# Altium PCB PCB.PcbDoc
Units mil, origin at the board's own origin, x right, y up, seen from the top; angles counter-clockwise.
Board outline 6000 x 4000 mil, 2 copper layers (Top Layer, Bottom Layer); 43 components, 32 nets, 110 pads, 0 vias.
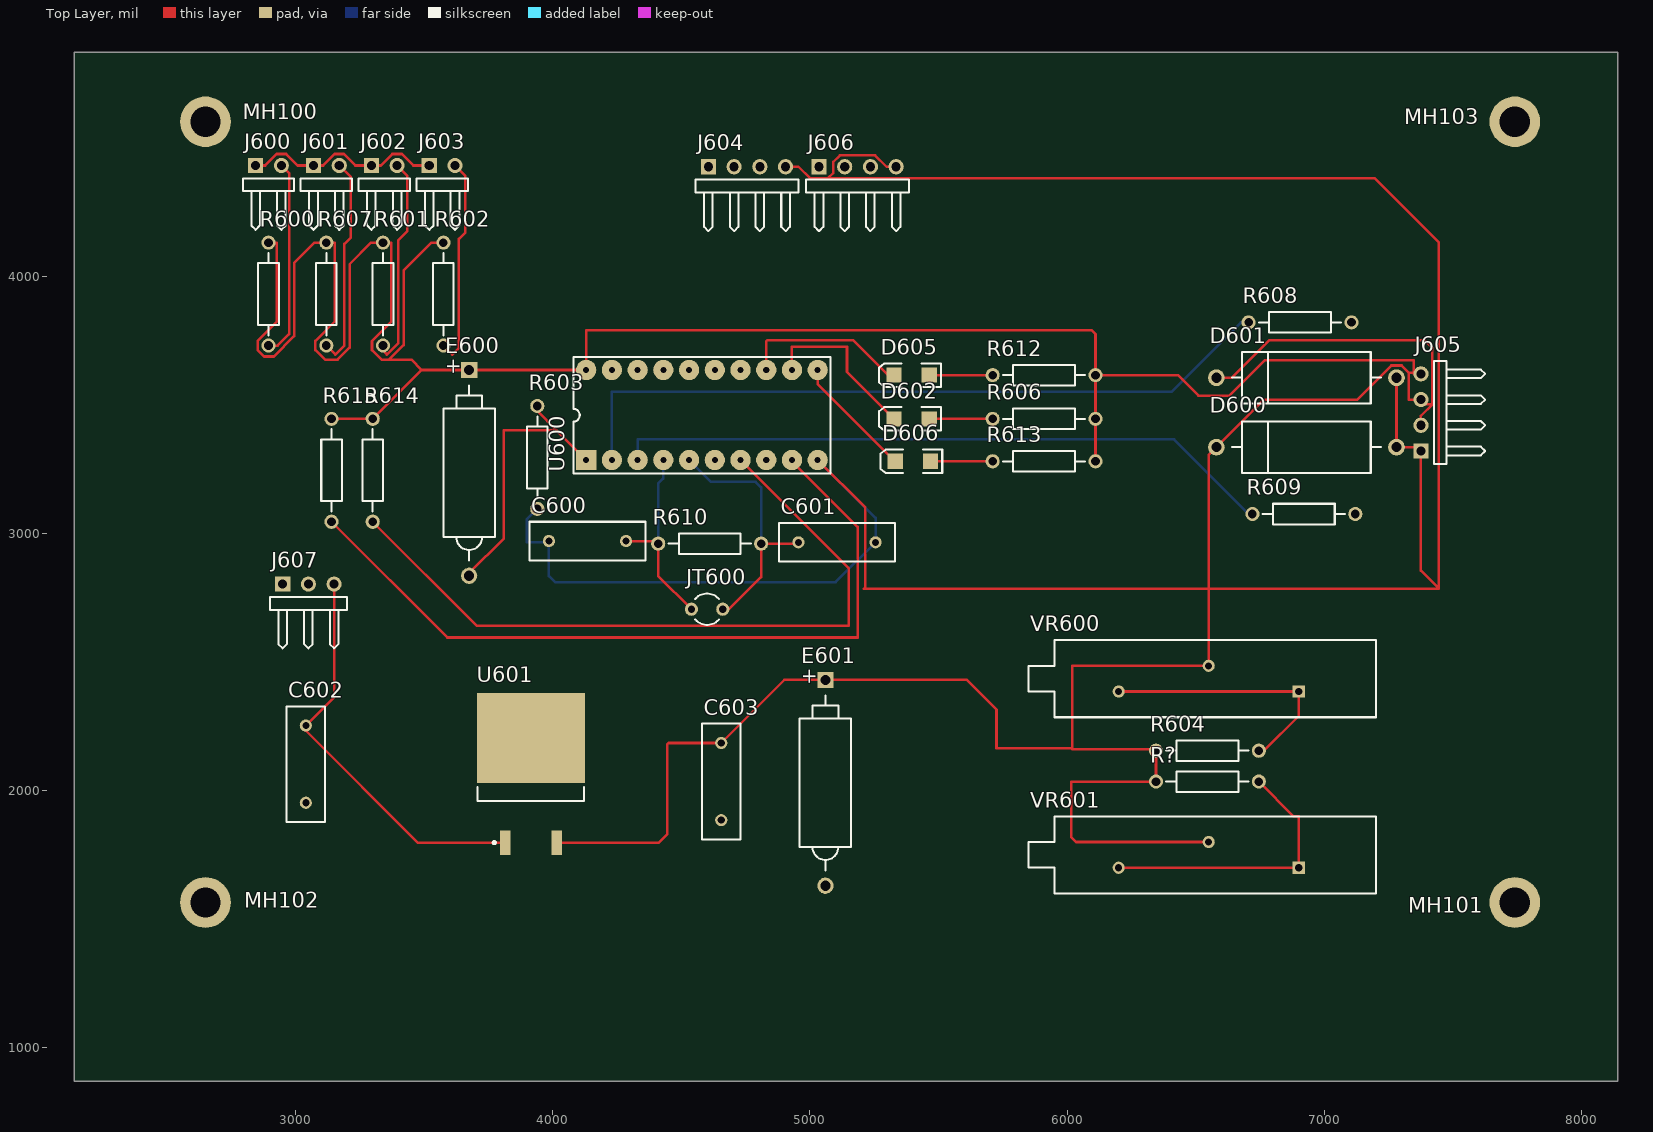
[diagram p0: Top Layer view]
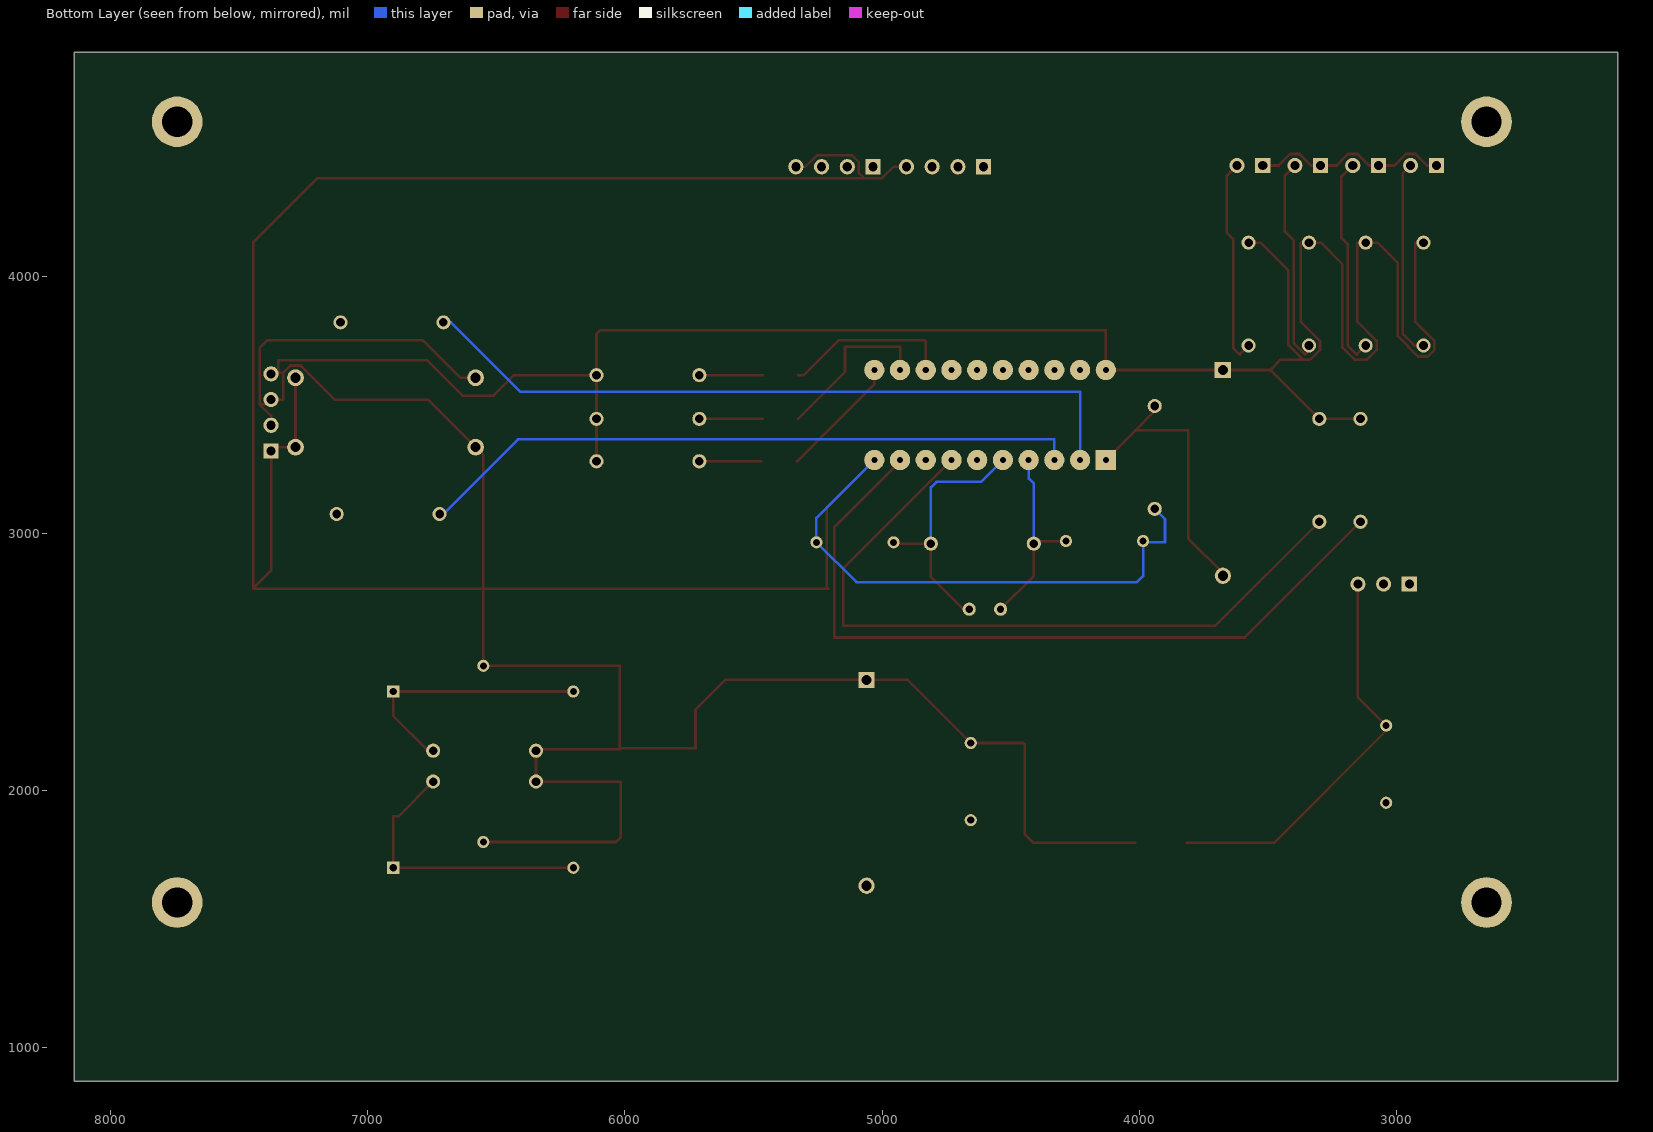
[diagram p1: Bottom Layer view, seen from below]

## Layer stack, top to bottom
Top Solder: solder mask 0.4, Solder Resist, Dk 3.5
Top Layer: signal copper 1.4
Dielectric 1: dielectric 12.6, FR-4, Dk 4.8
Bottom Layer: signal copper 1.4
Bottom Solder: solder mask 0.4, Solder Resist, Dk 3.5

## Board outline
2140,870 8140,870 8140,4870 2140,4870

## Design rules (kind name [scope] priority, off if disabled: settings)
Clearance [All] p1: gap=10
PolygonConnect [All] p1: connectstyle=Relief reliefconductorwidth=10 reliefentries=4 polygonreliefangle="90 Angle" airgapwidth=10
RoomDefinition Sheet1 [InComponentClass('Sheet1')] p1: confinementstyle=ConfineIn formatcopy=TRUE lockcomponents=FALSE outline 2525,4710 7850,4710 7850,1425 2525,1425
RoutingVias [All] p1: holewidth=28 width=50 viastyle="Through Hole" minholewidth=28 minwidth=50 maxholewidth=28 maxwidth=50
SolderMaskExpansion [All] p1: expansion=4
Width [All] p1: maxlimit=10 minlimit=10 preferedwidth=10
30 further rules are at their usual default settings.

## Classes and differential pairs
component class Sheet1: C600 C601 C602 C603 D600 D601 D602 D605 D606 E600 E601 J600 J601 J602 J603 J604 J605 J606 J607 JT600 R600 R601 R602 R603 R604 R606 R607 R608 R609 R610 R612 R613 R614 R615 R? U600 U601 VR600 VR601

## Components (designator, comment, footprint, x,y, rotation, side; value= is the part's Value field where it differs from the comment)
C600 "Cap" RAD-0.3 4135,2970 r0 top
C601 "Cap" RAD-0.3 5105,2965 r180 top
C602 "" RAD-0.3 3040,2102.52 r90 top
C603 "" RAD-0.3 4655,2035 r90 top
D600 "SMAJ5.1A" DIODE-0.7 6930,3335 r180 top
D601 "SMAJ5.1A" DIODE-0.7 6930,3605 r180 top
D602 "LED-R" 3.2X1.6X1.1 5395,3445 r180 top
D605 "LED-B" 3.2X1.6X1.1 5395,3615 r180 top
D606 "LED-R" 3.2X1.6X1.1 5400,3280 r180 top
E600 "Cap Pol2" POLAR0.8 3675,3235 r90 top
E601 "" POLAR0.8 5060,2030 r90 top
J600 "EH2" HDR1X2H 2845,4430 r0 top
J601 "EH2" HDR1X2H 3070,4430 r0 top
J602 "EH2" HDR1X2H 3295,4430 r0 top
J603 "EH2" HDR1X2H 3520,4430 r0 top
J604 "EH4" HDR1X4H 4605,4425 r0 top
J605 "EH4" HDR1X4H 7375,3320 r90 top
J606 "EH4" HDR1X4H 5035,4425 r0 top
J607 "EH3" HDR1X3H 2950,2802.52 r0 top
JT600 "24MHz" R38 4600,2705 r270 top
MH100 "HOLE-3.0mm_X" MH 2375,3575 r0 top
MH101 "HOLE-3.0mm_X" MH 7465,540 r0 top
MH102 "HOLE-3.0mm_X" MH 2375,540 r0 top
MH103 "HOLE-3.0mm_X" MH 7465,3575 r0 top
R600 "Res2" AXIAL-0.4 2895,3930 r90 top
R601 "Res2" AXIAL-0.4 3340,3930 r90 top
R602 "Res2" AXIAL-0.4 3575,3930 r90 top
R603 "Res2" AXIAL-0.4 3940,3295 r90 top
R604 "Res2" AXIAL-0.4 6545,2155 r180 top
R606 "Res2" AXIAL-0.4 5910,3445 r0 top
R607 "Res2" AXIAL-0.4 3120,3930 r90 top
R608 "Res2" AXIAL-0.4 6905,3820 r0 top
R609 "Res2" AXIAL-0.4 6920,3075 r0 top
R610 "Res2" AXIAL-0.4 4610,2960 r180 top
R612 "Res2" AXIAL-0.4 5910,3615 r0 top
R613 "Res2" AXIAL-0.4 5910,3280 r0 top
R614 "Res2" AXIAL-0.4 3300,3245 r90 top
R615 "Res2" AXIAL-0.4 3140,3245 r90 top
R? "Res2" AXIAL-0.4 6545,2035 r180 top
U600 "STC12C5052AD" DIP20 4130,3160 r90 top
U601 "" D2PAK_N 3915,2065 r90 top
VR600 "" VR3 6550,2435 r180 top
VR601 "" VR3 6550,1750 r180 top

## Footprints (in the part's own frame and the unit in brackets; to place one, negate y for a bottom-side part, rotate by r counter-clockwise, add the part's x,y. Pads: shape width x height; smd on the part's side, far side on the other; paste and mask are expansions set on the pad)
3.2X1.6X1.1 [mm] "SMT LED; 2 Flat Leads"
  rect 1.5x1.5 smd: 1(-1.75,0) 2(1.75,0)
  silkscreen extent -2.9,-1.15 3.2,1.15
AXIAL-0.4 [mm] "Axial Device, Thru-Hole; 2 Leads; 0.4 in Pin Spacing"
  round 1.4 hole 0.85: 1(-5.08,0) 2(5.08,0)
  silkscreen extent -4.06,-1.02 4.06,1.02
D2PAK_N [mm] "D2-PAK, 4-Leads, Body 8.8x10.4mm, Pitch 2.54mm, Lead Span 15.1mm, IPC Medium Density"
  rect 2.4x1.05 smd: 1(-6.8,2.54) 3(-6.8,-2.54)
  rect 8.9x10.65 smd: 2(3.55,0)
  silkscreen extent -6.92,-5.25 -1.3,5.25, body extent -2.7,-5.28 6.3,5.28, height 4.69
DIODE-0.7 [mm] "Diode, Thru-Hole; 2 Leads; 0.7 in Pin Spacing"
  round 1.65 hole 1: 1(-8.89,0) 2(8.89,0)
  silkscreen extent -7.37,-2.54 7.37,2.54
DIP20 [mm]
  rect 2x2 hole 0.6: 1(3.175,0)
  round 2 hole 0.6: 2(3.175,-2.54) 3(3.175,-5.08) 4(3.175,-7.62) 5(3.175,-10.16) 6(3.175,-12.7) 7(3.175,-15.24) 8(3.175,-17.78) 9(3.175,-20.32) 10(3.175,-22.86) 11(12.065,-22.86) 12(12.065,-20.32) 13(12.065,-17.78) 14(12.065,-15.24) 15(12.065,-12.7) 16(12.065,-10.16) 17(12.065,-7.62) 18(12.065,-5.08) 19(12.065,-2.54) 20(12.065,0)
  silkscreen extent 1.84,-24.13 13.36,1.27
HDR1X2H [mm] "Connector; Header; 2 Position; Right Angle"
  rect 1.5x1.5 hole 0.9: 1(0,0)
  round 1.5 hole 0.9: 2(2.54,0)
  silkscreen extent -1.27,-6.35 3.81,-1.27
HDR1X3H [mm] "Connector; Header; 3 Position; Right Angle"
  rect 1.5x1.5 hole 0.9: 1(0,0)
  round 1.5 hole 0.9: 2(2.54,0) 3(5.08,0)
  silkscreen extent -1.27,-6.35 6.35,-1.27
HDR1X4H [mm] "Connector; Header; 4 Position; Right Angle"
  rect 1.5x1.5 hole 0.9: 1(0,0)
  round 1.5 hole 0.9: 2(2.54,0) 3(5.08,0) 4(7.62,0)
  silkscreen extent -1.27,-6.35 8.89,-1.27
MH [mm]
  round 5 hole 3: 0(6.985,26.035)
POLAR0.8 [mm] "Polarized Capacitor; 2 Leads"
  rect 1.6x1.6 hole 1: 1(10.16,0)
  round 1.6 hole 1: 2(-10.16,0)
  silkscreen extent -8.64,-2.54 8.64,2.54
R38 [mm] "Crystal, Thru-Hole; 2 Leads; Body 3.1 x 8.2 mm (Dia.xH)"
  round 1.3 hole 0.7: 1(0,1.55) 2(0,-1.55)
  silkscreen extent -1.55,-1.19 1.55,1.17
RAD-0.3 [mm] "Radial Cap, Thru-Hole; 2 Leads; 0.3 in Pin Spacing"
  round 1.2 hole 0.7: 1(-3.81,0) 2(3.81,0)
  silkscreen extent -5.71,-1.91 5.71,1.91
VR3 [mm] "Thru-Hole; 3 Leads"
  rect 1.2x1.2 hole 0.7: 1(-8.89,1.27)
  round 1.2 hole 0.7: 2(0,-1.27) 3(8.89,1.27)
  silkscreen extent -16.51,-3.81 17.78,3.81

## Part data
C600 C601: "Capacitor"
C602 C603: library part Cap, "Capacitor"
D600 D601: library part "D Zener", "Zener Diode"
D602 D605 D606: library part LED2, "Typical RED, GREEN, YELLOW, AMBER GaAs LED"
E600: "Polarized Capacitor (Axial)"
E601: library part "Cap Pol2", "Polarized Capacitor (Axial)"
J600 J601 J602 J603: library part "Header 2H", "Header, 2-Pin, Right Angle"
J604 J605 J606: library part "Header 4H", "Header, 4-Pin, Right Angle"
J607: library part "Header 3H", "Header, 3-Pin, Right Angle"
JT600: library part XTAL, "Crystal Oscillator"
MH100 MH101 MH102 MH103: library part Component_1
R600 R601 R602 R603 R604 R606 R607 R608 R609 R610 R612 R613 R614 R615 R?: "Resistor"
U601: library part "Volt Reg", "Voltage Regulator"
VR600 VR601: library part "Res Tap", "Tapped Resistor"

## Nets (pads, with @x,y where several pads share a name; then routed paths per layer and width w, separated by ;. In a path a pad name is that pad's centre, name@x,y a point inside that pad or via, vN(x,y) a via of type N, cw(c..) or ccw(c..) an arc to the next point about the centre after c; other vN are vias at no path point)
+5VD: C600.1 C601.1 C603.2 D600.1 D600.2 D601.1 D601.2 E600.1 E601.1 J604.4 J605.1 J605.2 J605.3 J605.4 J606.4 R600.2 R601.2 R602.2 R603.1 R604.2 R606.2 R607.2 R612.2 R613.2 R614.2 R615.2 R?.2 U600.10 U600.20 U601.3 VR600.2 VR601.2 | length 27081.2
  Top Layer w10: R600.2 2927.56,4130 2927.56,3822.75 2852.44,3747.63 2852.44,3712.37 2877.37,3687.44 2915.73,3687.44 2995,3766.72 2995,4051.05 3073.95,4130 R607.2 3152.56,4130 3152.56,3822.75 3077.44,3747.63 3077.44,3712.37 3114.81,3675 3163.28,3675 3210,3721.72 3210,4046.05 3293.95,4130 R601.2 3372.56,4130 3372.56,3822.75 3297.44,3747.63 3297.44,3712.37 3334.81,3675 3363.28,3675 ; R615.2 R614.2 3490,3635 ; R602.2 3528.95,4130 3420,4021.05 3420,3731.72 3363.28,3675 ; U601.3 4412.28,1797.28 4445,1830 4445,2180 4450,2185 C603.2 4900,2430 E601.1 5610,2430 5725,2315 5725,2165 6015,2165 ; J604.4 4954.73,4425 4999.26,4380.47 5070.74,4380.47 ; U600.10 5215,3100 5215,2790 5210,2785 6550,2785 ; J606.4 5297.97,4425 5253.44,4469.53 5116.56,4469.53 5090.47,4443.44 5090.47,4400.2 5070.74,4380.47 ; R613.2 R606.2 R612.2 ; R604.2@6340,2160 6020,2160 6020,2485 VR600.2 6550,2785 ; R604.2 R?.2 6015,2035 6015,1820 6035,1800 VR601.2 ; D601.2 6640,3605 6785,3750 7390,3750 7419.53,3720.47 7419.53,3501.56 ; D601.1 D600.1 7360,3335 J605.1 7375,2855 7445,2785 ; 7342.81,3624.67 7327.48,3624.67 ; J605.2 7375,3457.03 7419.53,3501.56 ; J605.3 7327.48,3520 7327.48,3624.67 ; J605.4 7347.48,3620 7347.48,3672.48 6767.48,3672.48 6630,3535 6510,3535 6430,3615 R612.2 ; J605.3@7393.44,3501.56 7419.53,3501.56 ; 3363.28,3675 3450,3675 3490,3635 ; 3490,3635 E600.1 U600.20 4130,3790 6095,3790 6110,3775 R612.2 ; 5070.74,4380.47 7194.53,4380.47 7445,4130 7445,2785 ; 6550,2785 6550,3305 D600.2 6765,3520 7127.85,3520 7260.33,3652.48 7299.67,3652.48 7327.48,3624.67 ; 6550,2785 7445,2785
  Bottom Layer w10: R603.1 3900,3055 3900,2965 C600.1@3980,2965 ; C600.1 3985,2833.9 4008.9,2810 5100,2810 C601.1 5255,3060 U600.10
"LED  RUN#": D605.2 U600.13 | length 664.7
  Top Layer w10: U600.13 4830,3746.1 4833.9,3750 5168.9,3750 5303.9,3615 D605.2
"LED  USR0#": D602.2 U600.12 | length 659.4
  Top Layer w10: U600.12@4928.9,3636.1 4928.9,3725 5143.9,3725 5143.9,3627.2 D602.2
"LED  USR1#": D606.2 U600.11 | length 479.7
  Top Layer w10: U600.11 5030,3581.1 D606.2
LEFT: J600.1 J601.1 J602.1 J603.1 | length 785.7
  Top Layer w10: J600.1 2882.03,4430 2926.56,4474.53 2963.44,4474.53 3007.97,4430 J601.1 3107.03,4430 3151.56,4474.53 3188.44,4474.53 3232.97,4430 J602.1 3332.03,4430 3376.56,4474.53 3413.44,4474.53 3457.97,4430 J603.1
"MD0  DIR": U600.6
"MD0  EN#": R614.1 U600.7 | length 2836.7
  Top Layer w10: R614.1 3705,2640 5150,2640 5150,2865 U600.7
"MD1  DIR": U600.8
"MD1  EN#": R615.1 U600.9 | length 3022
  Top Layer w10: R615.1 3590,2595 5185,2595 5185,3025 U600.9@4930,3280
NetC600_2: C600.2 JT600.2 R610.2 U600.4 | length 755.1
  Top Layer w10: C600.2 R610.2@4400,2970 ; R610.2 4410,2833.98 JT600.2
  Bottom Layer w10: R610.2 4410,3193.9 4428.9,3212.8 U600.4@4428.9,3283.9
NetC601_2: C601.2 JT600.1 R610.1 U600.5 | length 1013.6
  Top Layer w10: JT600.1 4685,2705 4810,2830 R610.1 C601.2@4950,2960
  Bottom Layer w10: U600.5 4615,3200 4788.9,3200 4810,3178.9 R610.1
NetD602_1: D602.1 R606.1 | length 246.1
  Top Layer w10: D602.1 R606.1
NetD605_1: D605.1 R612.1 | length 246.1
  Top Layer w10: D605.1 R612.1
NetD606_1: D606.1 R613.1 | length 241.1
  Top Layer w10: D606.1 R613.1
NetE600_2: E600.2 R603.2 U600.1 | length 1104.6
  Top Layer w10: E600.2@3675,2845 3810,2980 3810,3400 4015,3400 ; R603.2 3940,3475 4015,3400 ; U600.1 4015,3400
NetJ600_2: J600.2 R600.1 | length 766.1
  Top Layer w10: R600.1 2930,3730 2975,3775 2975,4400 J600.2
NetJ601_2: J601.2 R607.1 | length 828
  Top Layer w10: R607.1 3155,3695 3190,3730 3190,4125 3215,4150 3215,4385 J601.2
NetJ602_2: J602.2 R601.1 | length 825.9
  Top Layer w10: R601.1 3340,3710 3355,3695 3400,3740 3400,4140 3435,4175 3435,4390 J602.2
NetJ603_2: J603.2 R602.1 | length 821.8
  Top Layer w10: R602.1 3610,3695 3635,3720 3635,4145 3660,4170 3660,4390 J603.2
NetR604_1: R604.1 VR600.1 VR600.3 | length 985.9
  Top Layer w10: VR600.3 VR600.1 6900,2290 R604.1@6765,2155
NetR608_1: R608.1 U600.2 | length 2851.8
  Bottom Layer w10: U600.2 4230,3550 6405,3550 6675,3820 R608.1
NetR609_1: R609.1 U600.3 | length 2590.1
  Bottom Layer w10: U600.3 4330,3365 6415,3365 6705,3075 R609.1
NetR?_1: R?.1 VR601.1 VR601.3 | length 1110.9
  Top Layer w10: VR601.3 VR601.1 6900,1900 6880,1900 R?.1
RXD: R608.2
SW0: U600.16
SW1: U600.17
SW2: U600.18
SW3: U600.19
TXD: R609.2
VCC: C602.2 J607.3 U601.1 | length 1570.5
  Top Layer w10: J607.3 3150,2362.52 C602.2 3040,2232.52 3475,1797.52 U601.1@3814.76,1797.52
"VMSR  RV0": U600.14
"VMSR  RV1": U600.15
pads on no net: C602.1 C603.1 E601.2 J604.1 J604.2 J604.3 J606.1 J606.2 J606.3 J607.1 J607.2 MH100.0 MH101.0 MH102.0 MH103.0 U601.2

## Text inside footprints (layer, text, board x,y; h text height)
E600: Top Overlay "+" at 3637.6,3615 h59.06 r90
E601: Top Overlay "+" at 5022.6,2410 h59.06 r90